# Altium PCB PCB1.PcbDoc
Units mil, origin at the board's own origin, x right, y up, seen from the top; angles counter-clockwise.
Board outline 3800 x 3000 mil, 2 copper layers (Top Layer, Bottom Layer), stack 61.756 mil thick; 47 components, 31 nets, 150 pads, 30 vias.
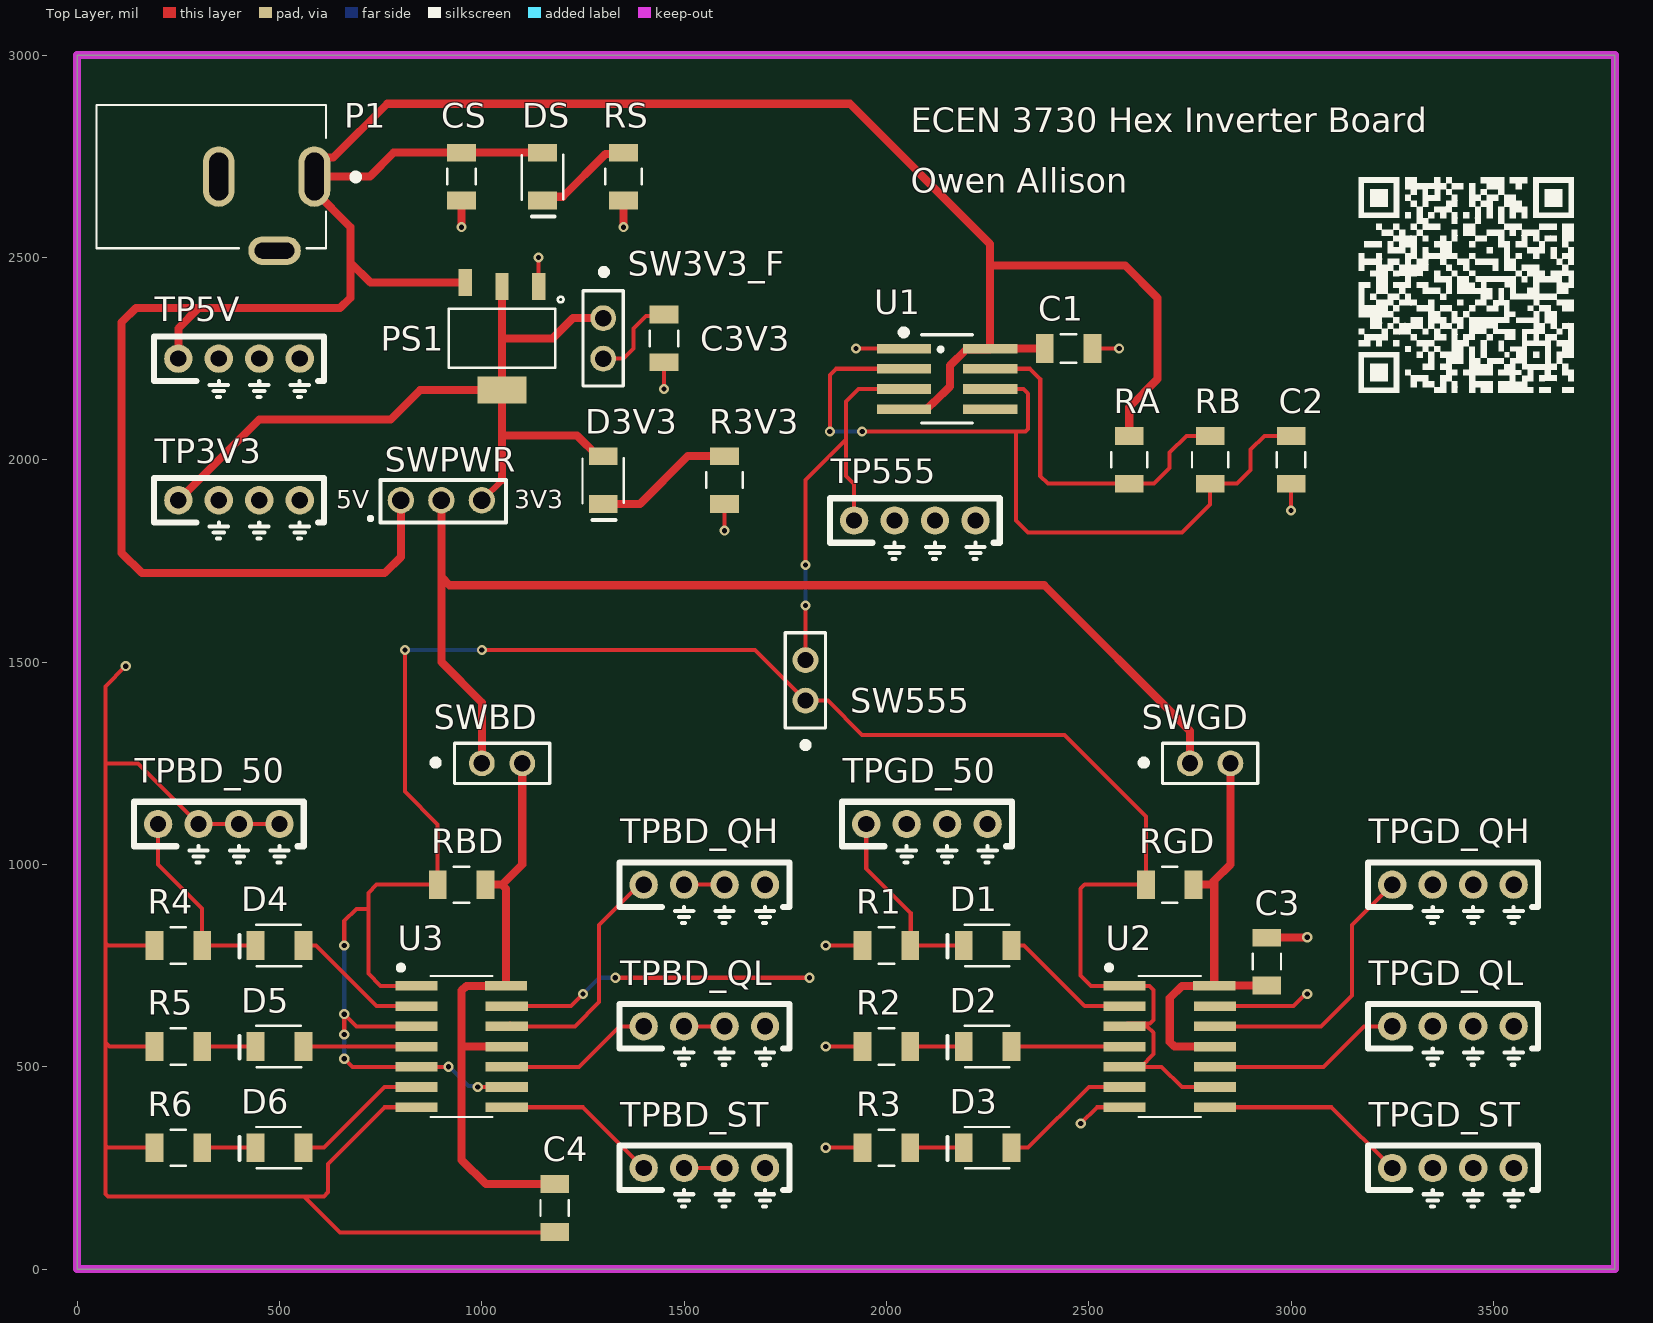
[diagram p0: Top Layer view]
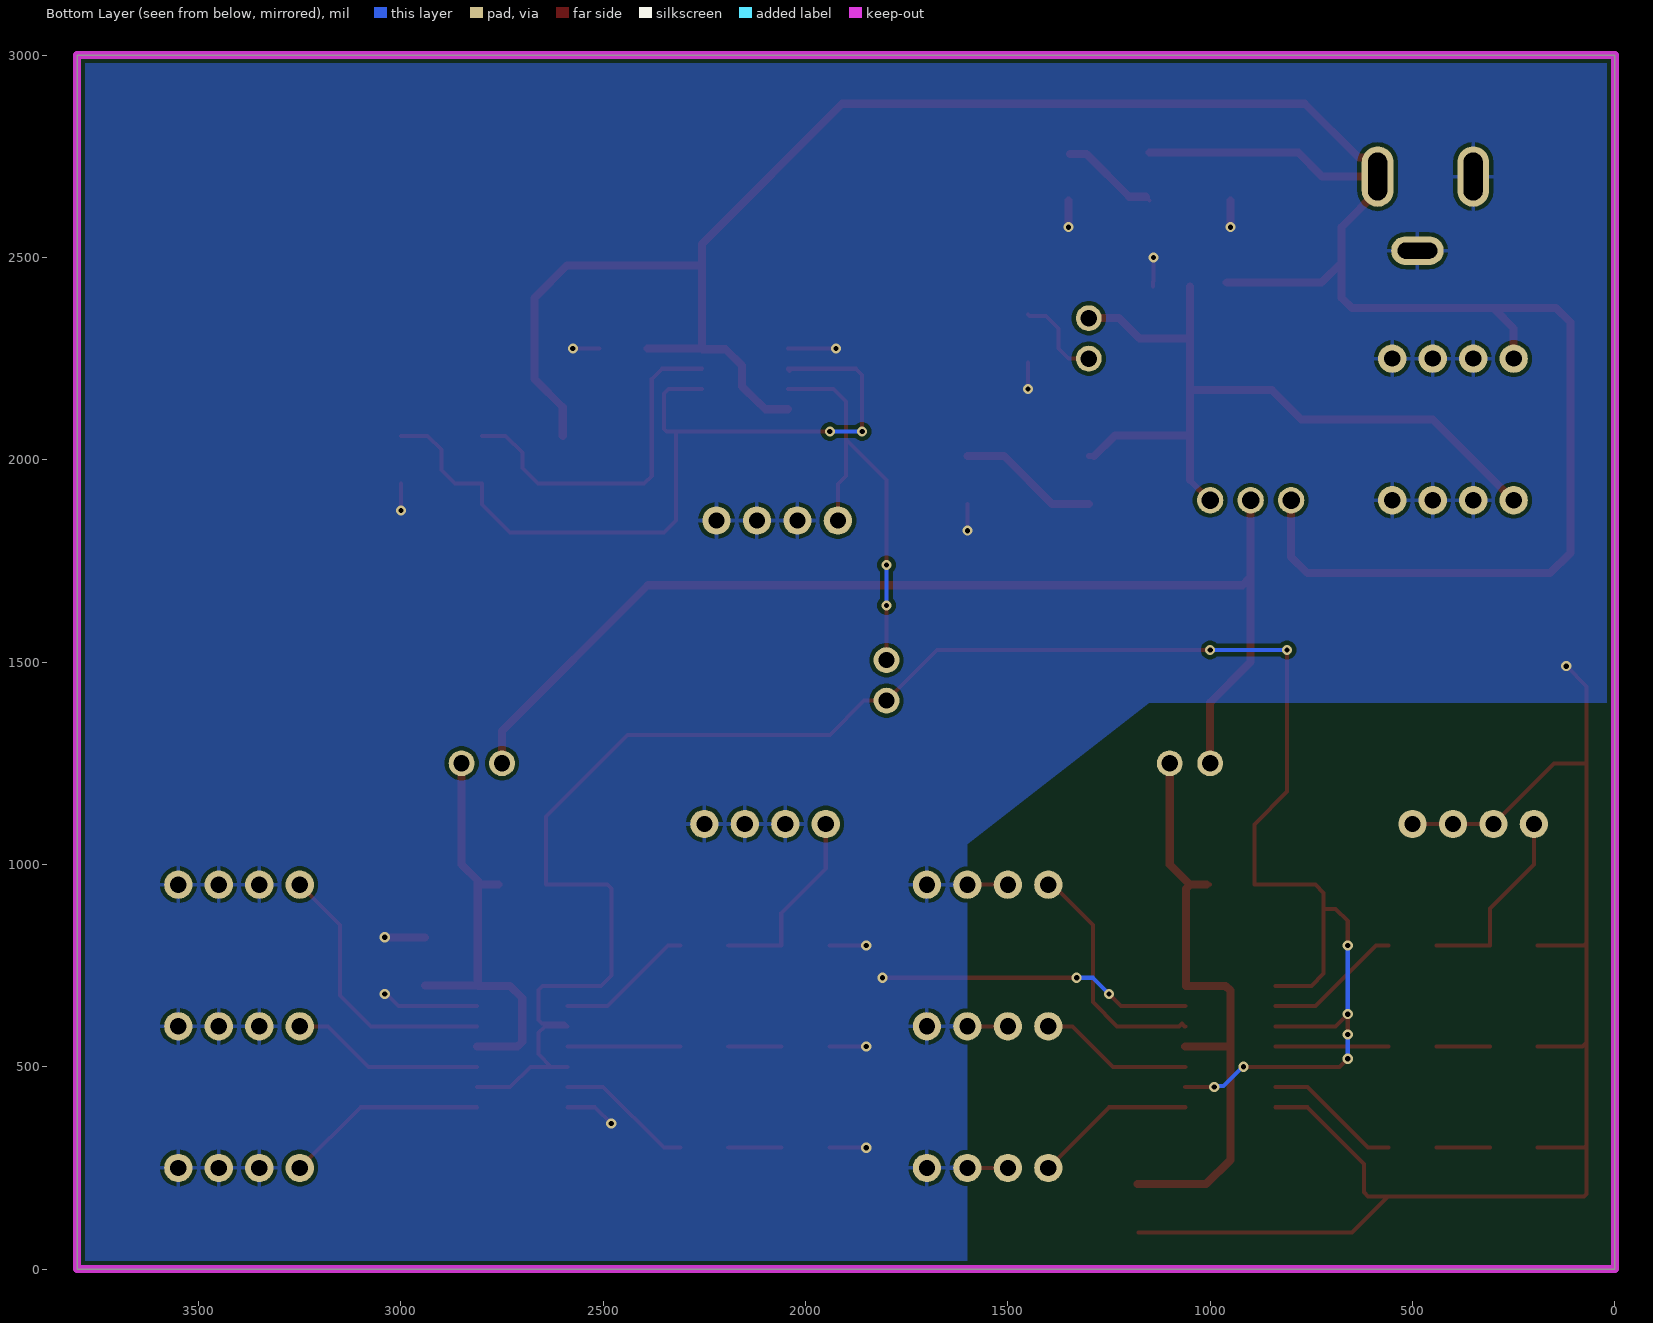
[diagram p1: Bottom Layer view, seen from below]
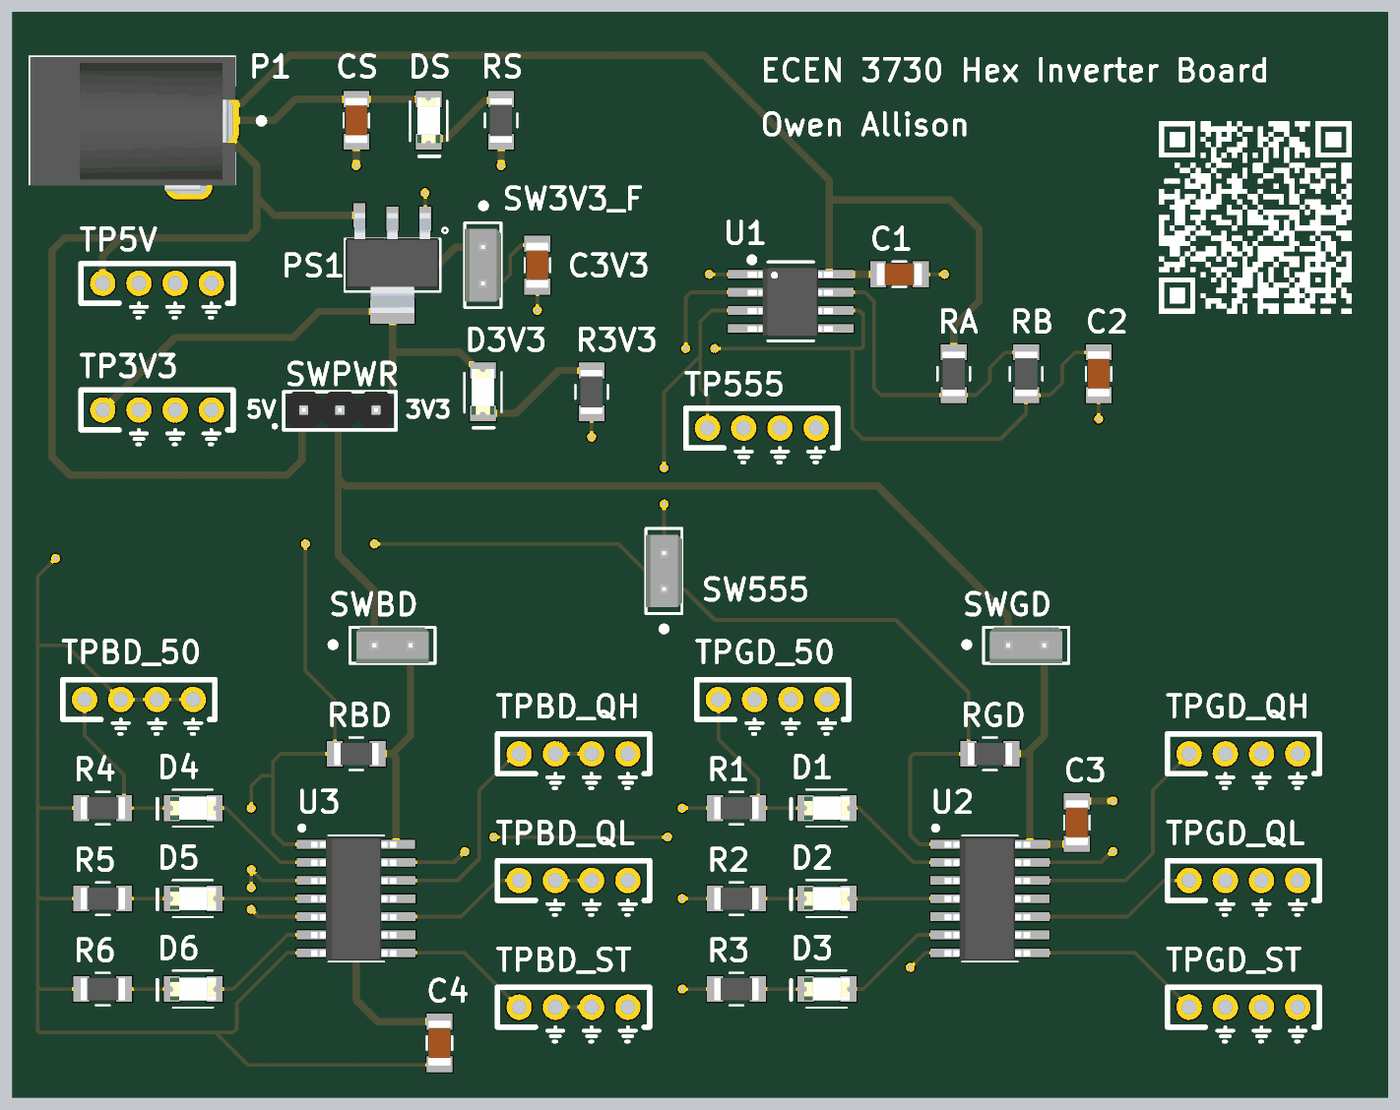
[diagram p2: 3D render of the assembled board from above, using the file's embedded part models]

## Layer stack, top to bottom
Top Solder: solder mask 1, SM-001, Dk 4
Top Layer: signal copper 1.378
Dielectric 1: core 59, Core-043, Dk 4.3
Bottom Layer: signal copper 1.378
Bottom Solder: solder mask 1, SM-001, Dk 4

## Board outline
0,0 3800,0 3800,3000 0,3000

## Design rules (kind name [scope] priority, off if disabled: settings)
BoardOutlineClearance [All] p1: gap=10 ignorepadtopadclearanceinfootprint=FALSE except(0: Arc-SplitContinuation Track-SplitContinuation SMDPad-SplitContinuation THPad-SplitContinuation Via-SplitContinuation Fill-SplitContinuation Poly-SplitContinuation Region-SplitContinuation Text-SplitContinuation)
Clearance [All] p1: gap=10 ignorepadtopadclearanceinfootprint=FALSE
PlaneClearance [All] p1: clearance=10
PlaneConnect [All] p1: planeconnectstyle=Direct reliefexpansion=20 reliefentries=4 reliefconductorwidth=10 reliefairgap=10
PolygonConnect [All] p1: thpad.connectstyle=Relief thpad.reliefconductorwidth=10 thpad.reliefentries=4 thpad.polygonreliefangle="90 Angle" thpad.airgapwidth=10 smdpad.connectstyle=Direct smdpad.reliefconductorwidth=10 smdpad.reliefentries=4 smdpad.polygonreliefangle="90 Angle" smdpad.airgapwidth=10 via.connectstyle=Direct via.reliefconductorwidth=10 via.reliefentries=4 via.polygonreliefangle="90 Angle" via.airgapwidth=10
RoutingVias [All] p1: holewidth=13 width=25 viastyle="Through Hole" minholewidth=13 minwidth=25 maxholewidth=60 maxwidth=80
SolderMaskExpansion [All] p1: expansion=4 istentingtop=FALSE
SupplyNets "Schematic Supply Nets_1" [InNet('GND')] p1: voltage=0.000
SupplyNets "Schematic Supply Nets" [InNet('+5')] p2: voltage=0.000
UnRoutedNet [All] p1: checkbadconnections=TRUE
Width "Schematic Width Constraint_5" [InNet('NetSWBD_1')] p1: maxlimit=50 minlimit=10 preferedwidth=20 minimp=50.000000 maximp=50.000000 favimp=50.000000
Width "Schematic Width Constraint_4" [InNet('NetC4_2')] p2: maxlimit=50 minlimit=10 preferedwidth=20 minimp=50.000000 maximp=50.000000 favimp=50.000000
Width "Schematic Width Constraint_3" [InNet('+5')] p3: maxlimit=50 minlimit=10 preferedwidth=20 minimp=50.000000 maximp=50.000000 favimp=50.000000
Width "Schematic Width Constraint_2" [InNet('NetC3_2')] p4: maxlimit=50 minlimit=10 preferedwidth=20 minimp=50.000000 maximp=50.000000 favimp=50.000000
Width "Schematic Width Constraint_1" [InNet('NetD3V3_1')] p5: maxlimit=50 minlimit=10 preferedwidth=20 minimp=50.000000 maximp=50.000000 favimp=50.000000
Width [All] p6: maxlimit=30 minlimit=10 preferedwidth=10 minimp=50.000000 maximp=50.000000 favimp=50.000000
27 further rules are at their usual default settings.

## Classes and differential pairs
component class Power-555: C1 C2 C3V3 CS D3V3 DS P1 PS1 R3V3 RA RB RS SW3V3_F SW555 SWPWR TP3V3 TP5V TP555 U1
component class Hex-Inverter2: C4 D4 D5 D6 R4 R5 R6 RBD SWBD TPBD_50 TPBD_QH TPBD_QL TPBD_ST U3
component class Hex-Inverter1: C3 D1 D2 D3 R1 R2 R3 RGD SWGD TPGD_50 TPGD_QH TPGD_QL TPGD_ST U2

## Components (designator, comment, footprint, x,y, rotation, side; value= is the part's Value field where it differs from the comment)
C1 "10uF" 1206_Passive_Capacitor 2450,2275 r180 top
C2 "1uF" 1206_Passive_Capacitor 3000,2000 r90 top
C3 "10uF" 1206_Passive_Capacitor 2940,760 r270 top
C3V3 "22uF" 1206_Passive_Capacitor 1450,2300 r90 top
C4 "10uF" 1206_Passive_Capacitor 1180,151 r90 top
CS "10uF" 1206_Passive_Capacitor 950,2700 r90 top
D1 "Red" LED_1206 2250,800 r180 top
D2 "Red" LED_1206 2250,550 r180 top
D3 "Red" LED_1206 2250,300 r180 top
D3V3 "Red" LED_1206 1300,1950 r270 top
D4 "Red" LED_1206 500,800 r180 top
D5 "Red" LED_1206 500,550 r180 top
D6 "Red" LED_1206 500,300 r180 top
DS "Red" LED_1206 1150,2700 r270 top
P1 "Power Jack" Power_Jack 586.22,2700 r180 top value="CONN PWR JACK 2X5.5MM SOLDER"
PS1 "AMS1117-3.3" LDO 1050,2300 r180 top value="IC REG LINEAR 3.3V 800MA SOT223"
R1 "47 Ohms" 1206_Passive_Resitor 2000,800 r0 top value=47Ohm
R2 "47 Ohms" 1206_Passive_Resitor 2000,550 r0 top value=47Ohm
R3 "47 Ohms" 1206_Passive_Resitor 2000,300 r0 top value=47Ohm
R3V3 "1k" 1206_Passive_Resitor 1600,1950 r90 top value="1K Ohm"
R4 "47 Ohms" 1206_Passive_Resitor 250,800 r0 top value=47Ohm
R5 "47 Ohms" 1206_Passive_Resitor 250,550 r0 top value=47Ohm
R6 "47 Ohms" 1206_Passive_Resitor 250,300 r0 top value=47Ohm
RA "1k" 1206_Passive_Resitor 2600,2000 r90 top value="1K Ohm"
RB "1k" 1206_Passive_Resitor 2800,2000 r90 top value="1K Ohm"
RBD "10k" 1206_Passive_Resitor 950,950 r0 top value=10KOhm
RGD "10k" 1206_Passive_Resitor 2700,950 r0 top value=10KOhm
RS "1k" 1206_Passive_Resitor 1350,2700 r90 top value="1K Ohm"
SW3V3_F "SW_2Pin_100mil_Switch" 2Pin-Header-Conn 1300,2350 r270 top
SW555 "SW_2Pin_100mil_Switch" 2Pin-Header-Conn 1800,1505 r270 top
SWBD "SW_2Pin_100mil_Switch" 2Pin-Header-Conn 1000,1250 r0 top
SWGD "SW_2Pin_100mil_Switch" 2Pin-Header-Conn 2750,1250 r0 top
SWPWR "PREC003SAAN-RC" 3_PIN_100mil 800,1900 r0 top value="CONN HEADER VERT 3POS 2.54MM"
TP3V3 "10x Probe TP" TP10x_Probe 400,1900 r0 top
TP5V "10x Probe TP" TP10x_Probe 400,2250 r0 top
TP555 "10x Probe TP" TP10x_Probe 2070,1850 r0 top
TPBD_50 "10x Probe TP" TP10x_Probe 350,1100 r0 top
TPBD_QH "10x Probe TP" TP10x_Probe 1550,950 r0 top
TPBD_QL "10x Probe TP" TP10x_Probe 1550,600 r0 top
TPBD_ST "10x Probe TP" TP10x_Probe 1550,250 r0 top
TPGD_50 "10x Probe TP" TP10x_Probe 2100,1100 r0 top
TPGD_QH "10x Probe TP" TP10x_Probe 3400,950 r0 top
TPGD_QL "10x Probe TP" TP10x_Probe 3400,600 r0 top
TPGD_ST "10x Probe TP" TP10x_Probe 3400,250 r0 top
U1 "LMC555CMX/NOPB" TS555IDTTR 2150,2200 r0 top
U2 "SN74AHC14DR" HEX_74AC14 2700,550 r0 top
U3 "SN74AHC14DR" HEX_74AC14 950,550 r0 top

## Footprints (in the part's own frame and the unit in brackets; to place one, negate y for a bottom-side part, rotate by r counter-clockwise, add the part's x,y. Pads: shape width x height; smd on the part's side, far side on the other; paste and mask are expansions set on the pad)
2Pin-Header-Conn [mm]
  round 1.62 hole 1.02: 1(0,0) 2(2.54,0)
  silkscreen extent -3.03,-1.27 4.26,1.26, body extent -1.27,-1.27 3.81,1.27, height 8.13
3_PIN_100mil [mm]
  round 1.65 hole 1.1: 1(0,0) 2(2.54,0) 3(5.08,0)
  silkscreen extent -2,-1.4 6.6,1.27, body extent -1.14,-1.27 6.48,1.27, height 8.38
1206_Passive_Capacitor [mil]
  rect 44x71 smd: 1(-59,0) 2(59,0)
  silkscreen extent -19,-35 19,35, body extent -63,-31 63,32, height 50
1206_Passive_Resitor [mil]
  rect 44x71 smd: 1(-59,0) 2(59,0)
  silkscreen extent -19,-45 19,45, body extent -61,-31 61,31, height 26
HEX_74AC14 [mm]
  rect 2.65x0.6 smd: 1(-2.836,3.81) 2(-2.836,2.54) 3(-2.836,1.27) 4(-2.836,0) 5(-2.836,-1.27) 6(-2.836,-2.54) 7(-2.836,-3.81) 8(2.836,-3.81) 9(2.836,-2.54) 10(2.836,-1.27) 11(2.836,0) 12(2.836,1.27) 13(2.836,2.54) 14(2.794,3.81)
  silkscreen extent -3.94,-4.43 1.95,5.08, body extent -3.18,-4.35 2.82,4.3, height 1.75
LDO [mm]
  rect 0.838x1.7 smd: 1(-2.311,-3.25) 2(0,-3.25) 3(2.311,-3.5)
  rect 3.099x1.7 smd: 4(0,3.25)
  silkscreen extent -3.86,-2.62 3.35,1.85, body extent -3.25,-3.65 3.25,3.35, height 1.85
LED_1206 [mil]
  rect 44x71 smd: 1(-59,0) 2(59,0)
  silkscreen extent -54,-51 99,51, body extent -63,-31 63,31, height 28
Power_Jack [mm]
  oval 2x3.8 hole 1.2 slot 3 at 90 deg: 1(0,0) 2(6,0)
  oval 3.3x1.8 hole 1 slot 2.5 at 0 deg: 3(2.5,4.65)
  silkscreen extent -2.79,-4.5 13.68,4.5, body extent -0.76,-4.45 13.64,4.95, height 11.49
TP10x_Probe [mil] "Small Probs footprint"
  round 70 hole 40: 1(-150,0) 2(-50,0) 2(50,0) 2(150,0)
  silkscreen extent -210,-95 210,55
TS555IDTTR [mm] "IC OSC Single Timer 2.7MHz 8SOIC"
  rect 3.4x0.6 smd: 1(-2.7,1.905) 2(-2.7,0.635) 3(-2.7,-0.635) 4(-2.7,-1.905) 5(2.7,-1.905) 6(2.7,-0.635) 7(2.7,0.635) 8(2.7,1.905)
  silkscreen extent -2.85,-2.77 1.6,3.05, body extent -3.03,-2.48 2.96,2.43, height 1.75

## Part data
C1 C3 C4 CS: library part C_10uF_1206, "10uF ±10% 50V X5R 1206 Multilayer Ceramic Capacitors MLCC - SMD/SMT RoHS", LCSC Part#=C13585, MFR Part #=CL31A106KBHNNNE, Datasheet=https://datasheet.lcsc.com/lcsc/1810221112_Samsung-Electro-Mechanics-CL31A106KBHNNNE_C13585.pdf, Type=Basic
C2: library part C_1uF_1206, "MULTILAYER CERAMIC CAPACITORS MLCC - SMD/SMT 1UF 50V 1206 ROHS", LCSC Part#=C1848, MFR Part #=CL31B105KBHNNNE, Digikey Link=https://www.digikey.com/product-detail/en/C1206C105M4RACTU/399-8150-1-ND/3471873/?itemSeq=304982366, Type=Basic
C3V3: library part C_22uF_1206, "22uF ±10% 25V X5R 1206 Multilayer Ceramic Capacitors MLCC - SMD/SMT RoHS", LCSC Part#=C12891, MFR Part #=CL31A226KAHNNNE, Datasheet=https://datasheet.lcsc.com/lcsc/1811031514_Samsung-Electro-Mechanics-CL31A226KAHNNNE_C12891.pdf, Type=basic
D1 D2 D3 D3V3 D4 D5 D6 DS: library part LED_RED_1206, "Red 621~631nm 1206 Light Emitting Diodes (LED) RoHS", LCSC Part#=C93133, MFR Part #=15-21/R6C-FQ1R1B/2T, Datasheet=https://datasheet.lcsc.com/szlcsc/1811151241_Everlight-Elec-15-21-R6C-FQ1R1B-2T_C93133.pdf, Type=Extended
P1: library part "P_Power Jack", "Power Barrel Connector Jack 2.10mm ID (0.083\"), 5.50mm OD (0.217\") Through Hole, Right Angle", LCSC Part#=C136744, MFR Part #=PJ-102A, Digikey Link=https://www.digikey.com/product-detail/en/PJ-102A/CP-102A-ND/275425/?itemSeq=304982367, Type=Extended
PS1: library part PS_AMS_LDO_3v3, "LOW DROPOUT REGULATORS(LDO) POSITIVE FIXED 1.3V @ 800MA 15V 3.3V 1A SOT-223 ROHS", LCSC Part#=C6186, MFR Part #=AMS1117-3.3, Type=Basic
R1 R2 R3 R4 R5 R6: library part R_47Ohm_1206, "47Ω ±5% 0.25W ±200ppm/℃ 1206 Chip Resistor - Surface Mount RoHS", LCSC Part#=C25384, MFR Part #=1206W4J0470T5E, Datasheet=https://datasheet.lcsc.com/lcsc/1811101020_UNI-ROYAL-Uniroyal-Elec-1206W4J0470T5E_C25384.pdf, Type=Extended
R3V3 RA RB RS: library part R_1K_1206, "CHIP RESISTOR - SURFACE MOUNT 1KOHMS ±1% 1/4W 1206 ROHS", LCSC Part#=C4410, MFR Part #=RNCP1206FTD1K00CT, Digikey Link=https://www.digikey.com/product-detail/en/RNCP1206FTD1K00/RNCP1206FTD1K00CT-ND/2240675/?itemSeq=304982373, Type=Basic
RBD RGD: library part R_10KOhm_1206, "10 kOhms ±5% 0.25W, 1/4W Chip Resistor 1206 (3216 Metric) Automotive AEC-Q200 Thick Film", LCSC Part#=C17902, MFR Part #=RMCF1206FT10K0, Digikey Link=https://www.digikey.com/en/products/detail/stackpole-electronics-inc/RMCF1206FT10K0/1759669, Type=Basic
SW3V3_F SW555 SWBD SWGD: "2Pin Header", LCSC Part#=C124375, Type=Extended
SWPWR: library part SW_3Pin_100mil_Switch, "Connector Header Through Hole 3 position 0.100\" (2.54mm)", LCSC Part#=C49257, Digikey Link=https://www.digikey.com/product-detail/en/PREC003SAAN-RC/S1012EC-03-ND/2774851/?itemSeq=304982371, MFR Part #=PREC003SAAN-RC, Type=Extended
TP3V3 TP5V TP555 TPBD_50 TPBD_QH TPBD_QL TPBD_ST TPGD_50 TPGD_QH TPGD_QL TPGD_ST: library part TP_10x_Probe, "Test Point 300 mil centers"
U1: library part U_555_Fast, "555 Type, Timer/Oscillator _Single_ IC 3MHz 8-SO", LCSC Part#=C90760, Package=SOIC-8, Digikey Link=https://www.digikey.com/product-detail/en/texas-instruments/LMC555CMX-NOPB/LMC555CMX-NOPBCT-ND/1010550, MFR Part #=LMC555CMX/NOPB, Type=Extended
U2 U3: library part U_74AHC14, "Inverter IC 6 Channel Schmitt Trigger 14-SOIC", LCSC Part#=C6942, Datasheet=https://datasheet.lcsc.com/szlcsc/ON-Semicon-ON-74AC14SCX_C5482.pdf, MFR Part #=SN74AHC14DR, Type=Extended

## Via types
v1: diameter 25, hole 13, Top Layer to Bottom Layer, 30 vias

## Nets (pads, with @x,y where several pads share a name; then routed paths per layer and width w, separated by ;. In a path a pad name is that pad's centre, name@x,y a point inside that pad or via, vN(x,y) a via of type N, cw(c..) or ccw(c..) an arc to the next point about the centre after c; other vN are vias at no path point)
+5: C1.2 CS.2 DS.1 P1.1 PS1.3 RA.2 SWPWR.1 TP5V.1 U1.4 U1.8 | length 6781.8
  Top Layer w20: TP5V.1 250,2325 300,2375 ; P1.1@586.22,2664.57 675,2575.79 675,2487.89 ; SWPWR.1 800,1760 760,1720 160,1720 110,1770 110,2340 145,2375 300,2375 ; PS1.3 725.1,2437.8 675,2487.89 ; DS.1 CS.2 782.24,2759 723.24,2700 P1.1 586.22,2719.54 613.35,2746.67 632.89,2746.67 766.22,2880 1910,2880 2256.3,2533.7 2256.3,2480 ; U1.4 2098.82,2125 2114.77,2140.95 2116.68,2140.95 2157.07,2181.35 2157.07,2232.8 2197.46,2273.19 2254.49,2273.19 U1.8 ; C1.2 U1.8 ; RA.2 2600,2130 2670,2200 2670,2400 2590,2480 2256.3,2480 ; 300,2375 650,2375 675,2400 675,2487.89 ; U1.8 2256.3,2480
GND: C1.1 C2.1 C3.1 C3V3.1 C4.1 CS.1 P1.2 P1.3 PS1.1 R1.1 R2.1 R3.1 R3V3.1 R4.1 R5.1 R6.1 RS.1 TP3V3.2 TP5V.2 TP555.2 TPBD_50.2 TPBD_QH.2 TPBD_QL.2 TPBD_ST.2 TPGD_50.2 TPGD_QH.2 TPGD_QL.2 TPGD_ST.2 U1.1 U2.7 U2.13 U3.7 U3.13 | length 6156.6
  Top Layer w10: v1(120,1490) 70,1440 70,1250 ; R6.1 75.86,300 70,305.86 ; R5.1 80,550 70,560 ; R4.1 75.86,800 70,805.86 ; TPBD_50.2@500,1100 400,1100 300,1100 300,1110 290,1110 150,1250 70,1250 ; U3.7 760,400 620,260 620,190 610,180 560,180 ; U3.13 1220,650 v1(1250,680) ; v1(1140,2500) 1140,2440 1141,2439 PS1.1 ; C4.1@1177,90 650,90 560,180 ; v1(1330,720) v1(1810,720) ; v1(1450,2175) C3V3.1 ; TPBD_ST.2@1500,250 TPBD_ST.2@1600,250 ; TPBD_QL.2@1500,600 TPBD_QL.2@1600,600 ; TPBD_QH.2@1500,950 TPBD_QH.2@1600,950 ; v1(1600,1825) R3V3.1 ; v1(1850,300) R3.1 ; v1(1850,550) R2.1 ; v1(1850,800) R1.1 ; v1(1925,2275) U1.1 ; v1(2480,360) 2520,400 U2.7 ; C1.1 v1(2575,2275) ; U2.13 3005.94,650 3035.94,680 v1(3040,680) ; C3.1 C3.1@2940,820 ; v1(3000,1875) C2.1 ; 70,305.86 70,185.86 75.86,180 560,180 ; 70,305.86 70,560 ; 70,560 70,805.86 ; 70,805.86 70,1250
  Top Layer w20: v1(950,2575) CS.1 ; v1(1350,2575) RS.1 ; C3.1@2940,820 2940.5,819.5 3039.5,819.5 v1(3040,820)
  Bottom Layer w10: v1(1250,680) 1290,720 v1(1330,720)
NetC2_2: C2.2 RB.1 U1.2 U1.6 | length 2085.4
  Top Layer w10: v1(1860,2070) 1860,2210 1875,2225 U1.2 2043.7,2223.7 U1.2@2040,2220 ; v1(1940,2070) 2320,2070 ; U1.6 2338.29,2175 2350,2163.29 2350,2075.86 2344.14,2070 2320,2070 ; C2.2 2934,2059 2900,2025 2900,1975 2866,1941 RB.1 2800,1890 2730,1820 2350,1820 2320,1850 2320,2070
  Bottom Layer w10: v1(1860,2070) v1(1940,2070)
NetC3_2: C3.2 RGD.2 SWGD.2 U2.11 U2.14 | length 1099.3
  Top Layer w20: RGD.2 2800,950 2810,960 ; U2.11 2711.72,550 2700,561.72 2700,670 2730,700 U2.14 ; SWGD.2 2850,1000 2810,960 ; C3.2 2939.5,700.5 2810.5,700.5 U2.14 ; U2.14 2810,960
NetC3V3_2: C3V3.2 SW3V3_F.2 | length 224.4
  Top Layer w10: SW3V3_F.2 1350,2250 1375,2275 1375,2325 1405.36,2355.36 1446.36,2355.36 C3V3.2
NetC4_2: C4.2 RBD.2 SWBD.2 U3.11 U3.14 | length 1524.5
  Top Layer w10: RBD.2@1000,950 RBD.2
  Top Layer w20: RBD.2 1050,950 ; U3.11 950,550 ; SWBD.2 1100,1000 1050,950 ; C4.2 1010,210 950,270 950,550 ; 950,550 950,688.28 961.72,700 U3.14 1060,940 1050,950
NetD1_1: D1.1 U2.2 | length 341.5
  Top Layer w10: D1.1 2309.14,799.86 2340.14,799.86 2490,650 U2.2
NetD1_2: D1.2 R1.2 TPGD_50.1 | length 478
  Top Layer w10: TPGD_50.1 1950,990 2060,880 2060,801 R1.2 D1.2
NetD2_1: D2.1 U2.4 | length 279.3
  Top Layer w10: D2.1 U2.4
NetD2_2: D2.2 R2.2 | length 132
  Top Layer w10: R2.2 D2.2
NetD3_1: D3.1 U2.6 | length 341.5
  Top Layer w10: D3.1 2350,300 2500,450 U2.6
NetD3_2: D3.2 R3.2 | length 132
  Top Layer w10: R3.2 D3.2
NetD3V3_1: D3V3.1 PS1.2 PS1.4 SW3V3_F.1 SWPWR.3 TP3V3.1 | length 2003.6
  Top Layer w15: SWPWR.3 1050,1950 ; 1050,2061.02 1051.02,2060 ; D3V3.1@1286.5,2009 D3V3.1
  Top Layer w20: TP3V3.1 450,2100 775,2100 847.05,2172.05 PS1.4 ; 1050,1950 1050,2061.02 PS1.4 ; PS1.2 1050,2300 ; 1051.02,2060 1235.5,2060 D3V3.1@1286.5,2009 ; SW3V3_F.1 1225,2350 1175,2300 1050,2300 ; PS1.4 1050,2300
NetD3V3_2: D3V3.2 R3V3.2 | length 348.9
  Top Layer w20: D3V3.2 1391,1891 1509,2009 R3V3.2
NetD4_1: D4.1 U3.2 | length 341.5
  Top Layer w10: D4.1 559.14,799.86 590.14,799.86 740,650 U3.2
NetD4_2: D4.2 R4.2 TPBD_50.1 | length 477.1
  Top Layer w10: TPBD_50.1 200,1000 309,891 R4.2 D4.2
NetD5_1: D5.1 U3.4 | length 279.3
  Top Layer w10: D5.1 U3.4
NetD5_2: D5.2 R5.2 | length 132
  Top Layer w10: R5.2 D5.2
NetD6_1: D6.1 U3.6 | length 341.5
  Top Layer w10: D6.1 610,300 760,450 U3.6
NetD6_2: D6.2 R6.2 | length 132
  Top Layer w10: R6.2 D6.2
NetDS_2: DS.2 RS.2 | length 248.9
  Top Layer w10: DS.2 DS.2@1159,2650 ; RS.2@1346.36,2755.36 RS.2
  Top Layer w20: DS.2@1159,2650 1200,2650 1305.36,2755.36 RS.2@1346.36,2755.36
NetRA_1: RA.1 RB.2 U1.7 | length 873.1
  Top Layer w10: U1.7 2355,2225 2380,2200 2380,1960 2399,1941 RA.1 2661,1941 2700,1980 2700,2018 2741,2059 RB.2
NetRBD_1: RBD.1 RGD.1 SW555.2 U2.1 U2.3 U2.5 U2.9 U3.1 U3.3 U3.5 U3.9 | length 5473.5
  Top Layer w10: v1(660,520) 680,500 v1(917.5,500) ; v1(660,580) v1(660,630) 690,600 U3.3 ; v1(660,800) 660,860 690,890 720,890 ; v1(810,1530) 810,1180 891,1099 RBD.1 740,950 720,930 720,890 ; U3.1 750,700 720,730 720,890 ; v1(990,450) U3.9 ; v1(1000,1530) 1675,1530 SW555.2 1855,1405 1940,1320 2440,1320 2641,1119 RGD.1 2490,950 2480,940 2480,725.86 2505.86,700 U2.1 2650,700 2660,690 2660,615.86 2650.95,606.81 2595.16,606.81 U2.3 2644.14,600 2660,584.14 2660,531.3 U2.5@2628.7,500 ; U2.5 U2.5@2628.7,500 ; U2.9 2730,450 2680,500 U2.5@2628.7,500
  Bottom Layer w10: v1(660,520) v1(660,580) ; v1(660,630) v1(660,800) ; v1(810,1530) v1(1000,1530) ; v1(917.5,500) 920,500 967.13,452.87 987.13,452.87 v1(990,450)
NetSW555_1: SW555.1 TP555.1 U1.3 | length 1030.3
  Top Layer w10: SW555.1@1800,1520 v1(1800,1640) ; v1(1800,1740) 1800,1950 1900,2050 ; TP555.1 1920,1940 1900,1960 1900,2050 ; U1.3 1930.86,2175 1900,2144.14 1900,2050
  Bottom Layer w10: v1(1800,1640) v1(1800,1740)
NetSWBD_1: SWBD.1 SWGD.1 SWPWR.2 | length 2778.8
  Top Layer w20: SWPWR.2 900,1710 ; SWBD.1 1000,1400 900,1500 900,1710 ; SWGD.1 2750,1330 2390,1690 920,1690 900,1710
NetTPBD_QH_1: TPBD_QH.1 U3.12 | length 600.3
  Top Layer w10: U3.12 1063.19,600 1070,606.81 1076.81,600 1230,600 1290,660 1290,850 1390,950 TPBD_QH.1
NetTPBD_QL_1: TPBD_QL.1 U3.10 | length 379.8
  Top Layer w10: U3.10 1240,500 1340,600 TPBD_QL.1
NetTPBD_ST_1: TPBD_ST.1 U3.8 | length 400.5
  Top Layer w10: U3.8 1250,400 TPBD_ST.1
NetTPGD_QH_1: TPGD_QH.1 U2.12 | length 685.3
  Top Layer w10: U2.12 3074.14,600 3150,675.86 3150,850 TPGD_QH.1
NetTPGD_QL_1: TPGD_QL.1 U2.10 | length 479.8
  Top Layer w10: U2.10 3080,500 3180,600 TPGD_QL.1
NetTPGD_ST_1: TPGD_ST.1 U2.8 | length 500.5
  Top Layer w10: U2.8 3100,400 TPGD_ST.1
pads on no net: U1.5

## Polygon pours and split planes (outlines as drawn)
GND on Bottom Layer "GND_L02_P000" (solid, pour order 0): 0,3000 0,0 3800,0 3800,3000

## Keep-outs
Keep-Out Layer:
  the board outline again, w20

## Other copper
Bottom Layer:
  pour cut-out: 0,1400 1150,1400 1600,1050 1600,0 0,0

## Silkscreen, mask and mechanical layers (free items; w line width, h text height)
Top Overlay:
  drawing of 83 lines, arcs and shapes, not listed
  text "ECEN 3730 Hex Inverter Board" at 2060,2810 h60
  text "Owen Allison" at 2060,2660 h60
  text "5V" at 640,1880 h45
  text "3V3" at 1080,1880 h45